# Altium PCB CodeBlockPCB.PcbDoc
Units mm, origin at the board's own origin, x right, y up, seen from the top; angles counter-clockwise.
Board outline 65 x 65 mm, 2 copper layers (Top Layer, Bottom Layer); 37 components, 43 nets, 215 pads, 31 vias.
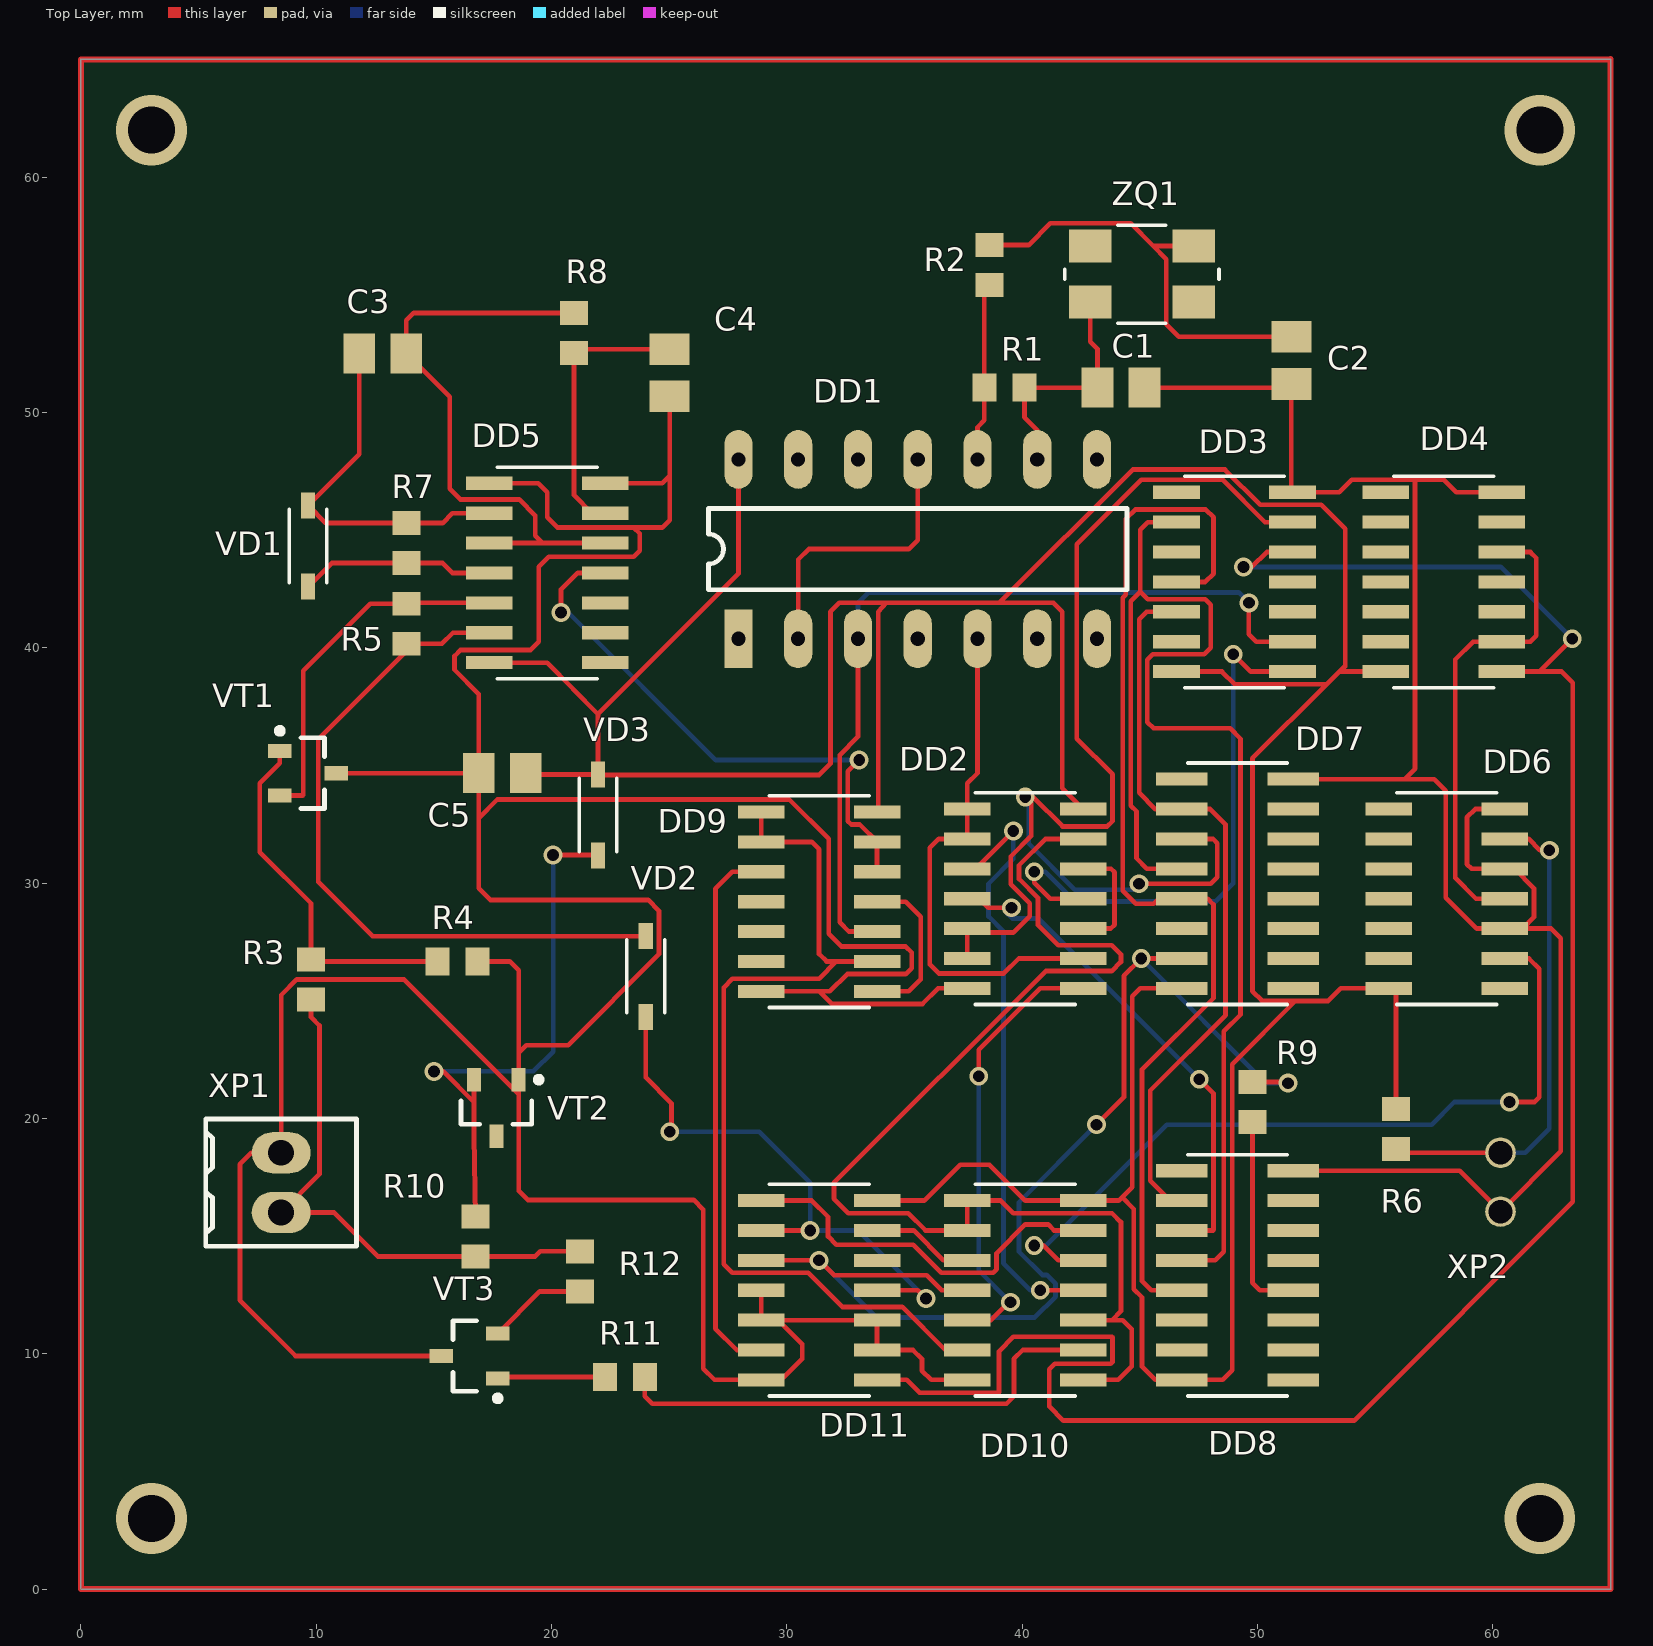
[diagram p0: Top Layer view]
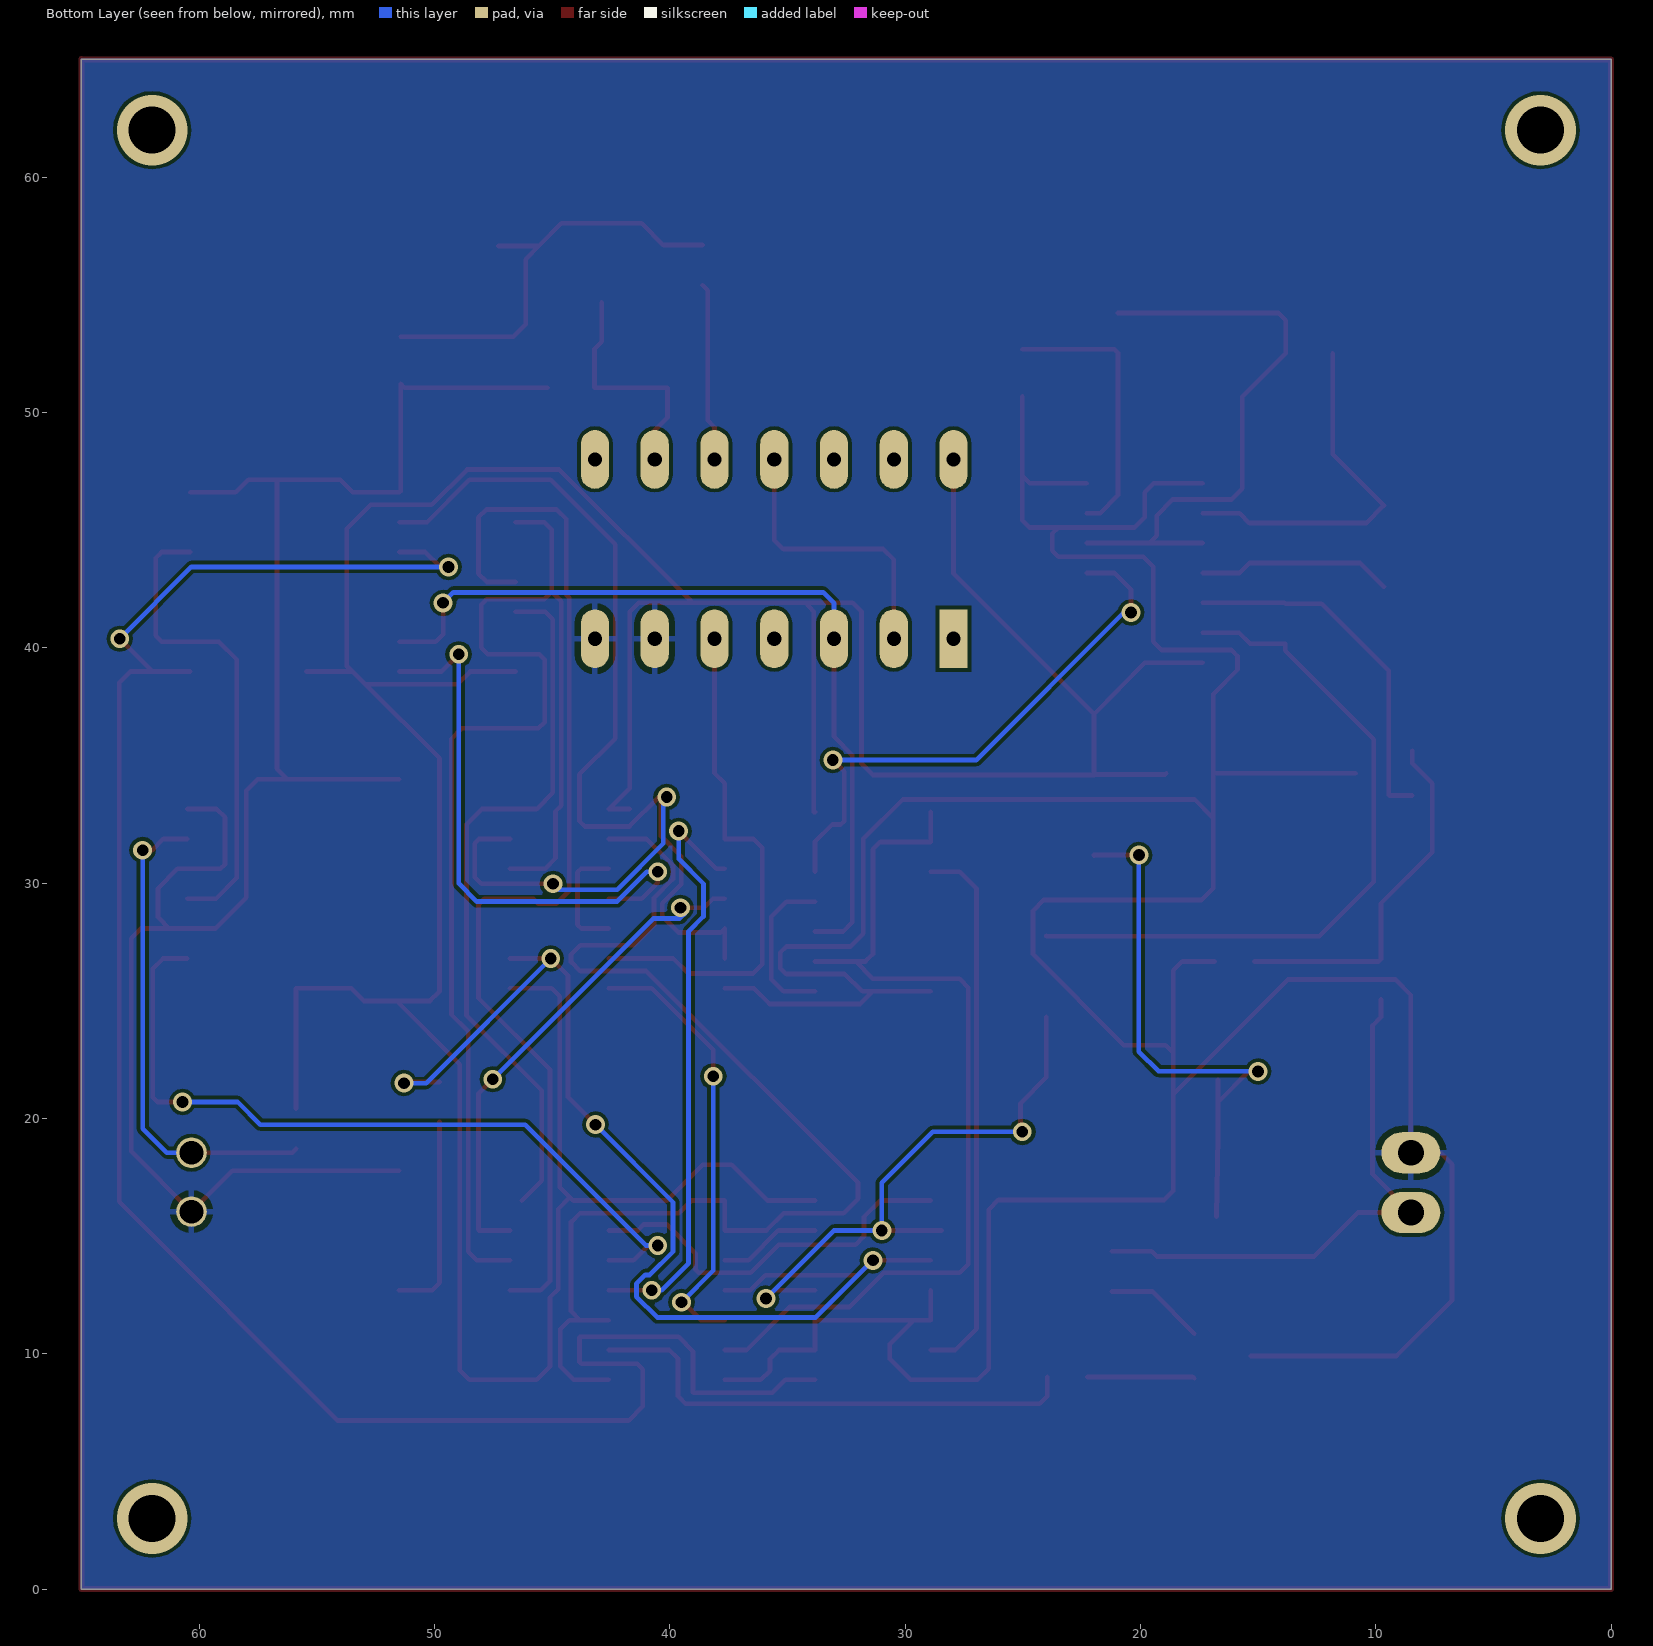
[diagram p1: Bottom Layer view, seen from below]
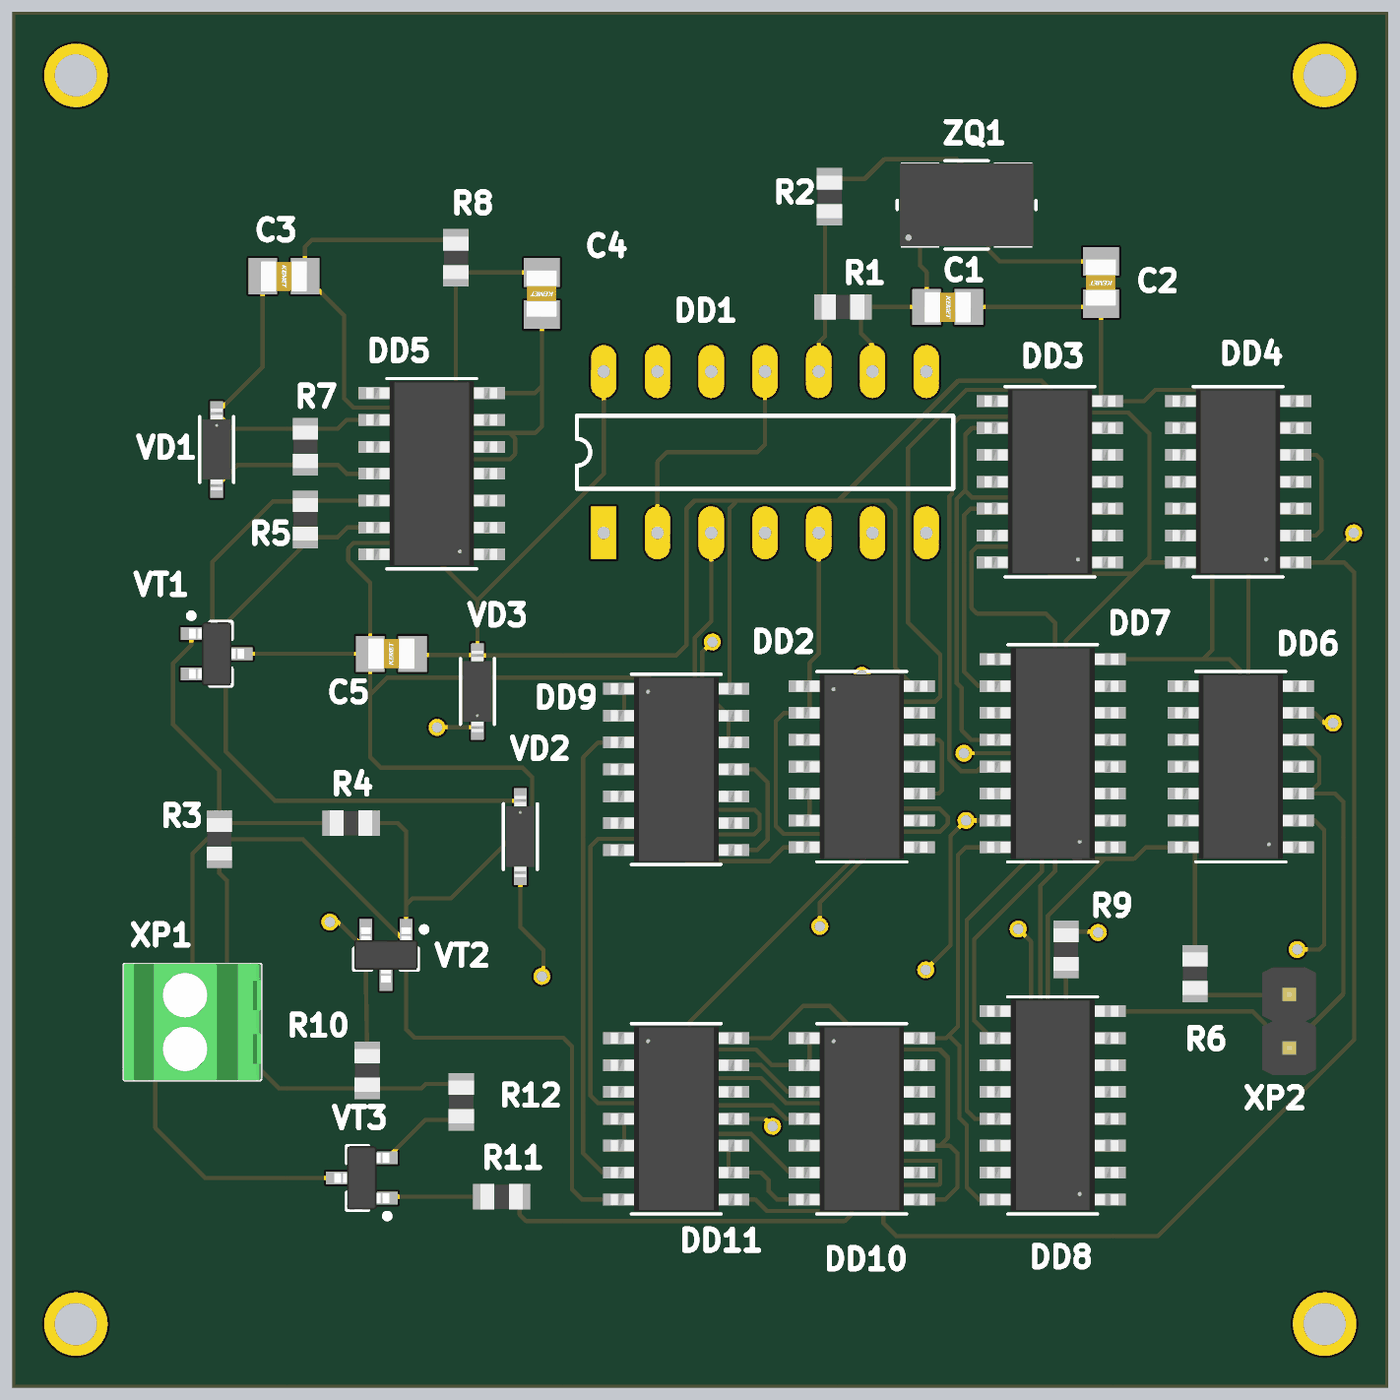
[diagram p2: 3D render of the assembled board from above, using the file's embedded part models]

## Layer stack, top to bottom
Top Solder: solder mask 0.0102, Solder Resist, Dk 3.5
Top Layer: signal copper 0.0356
Dielectric 1: core 0.32, FR-4, Dk 4.8
Bottom Layer: signal copper 0.0356
Solder Side: solder mask 0.0102, Solder Resist, Dk 3.5

## Board outline
0,0 0,65 65,65 65,0

## Design rules (kind name [scope] priority, off if disabled: settings)
Clearance [All] p1: gap=0.15 ignorepadtopadclearanceinfootprint=FALSE
HoleSize [All] p1: absolutevalues=TRUE maxlimit=3 minlimit=0.5 maxpercent=80.000 minpercent=20.000
PolygonConnect [All] p1: connectstyle=Relief reliefconductorwidth=0.254 reliefentries=4 polygonreliefangle="90 Angle" airgapwidth=0.254
RoutingVias [All] p1: holewidth=0.5 width=0.8 viastyle="Through Hole" minholewidth=0.4 minwidth=0.6 maxholewidth=0.4 maxwidth=0.6
SolderMaskExpansion [All] p1: expansion=0.102
Width Width_GND [InNetClass('GND')] p1: maxlimit=0.3 minlimit=0.3 preferedwidth=0.3
Width Width_VDD [InNetClass('VDD')] p2: maxlimit=0.3 minlimit=0.3 preferedwidth=0.3
Width [All] p3: maxlimit=0.25 minlimit=0.15 preferedwidth=0.2
29 further rules are at their usual default settings.

## Components (designator, comment, footprint, x,y, rotation, side; value= is the part's Value field where it differs from the comment)
C1 "С-0805 50 В 62 пФ 5% C0G/NP0 Kemet" C-0805 44.196,51.054 r180 top value="62 пФ"
C2 "С-0805 50 В 22 пФ 5% C0G/NP0 Kemet" C-0805 51.435,52.213 r90 top value="22 пФ"
C3 "С-0805 50 В 0.1 пФ 5% C0G/NP0 Kemet" C-0805 12.827,52.514 r180 top value="0.1 пФ"
C4 "С-0805 50 В 3300 пФ 5% C0G/NP0 Kemet" C-0805 25.019,51.689 r90 top value="3300 пФ"
C5 "С-0805 50 В 100 пФ 5% C0G/NP0 Kemet" C-0805 17.907,34.671 r0 top value="100 пФ"
DD1 "К176ИЕ5 СССР" DIP14 27.94,40.386 r90 top
DD2 "SN74F38DR Texas Instruments" D14 40.132,29.337 r0 top
DD3 "SN74F24DR Texas Instruments" D14 49.022,42.799 r180 top
DD4 "SN74F24DR Texas Instruments" D14 57.912,42.799 r180 top
DD5 "SN74F86DR Texas Instruments" D14 19.812,43.18 r180 top
DD6 "SN74F13DR Texas Instruments" D14 58.039,29.337 r180 top
DD7 "SN74F28DR Texas Instruments" D16 49.149,29.972 r180 top
DD8 "SN74F28DR Texas Instruments" D16 49.149,13.335 r180 top
DD9 "SN74F38DR Texas Instruments" D14 31.369,29.21 r0 top
DD10 "SN74F10DR Texas Instruments" D14 40.132,12.7 r0 top
DD11 "SN74F13DR Texas Instruments" D14 31.369,12.7 r0 top
R1 "R-0805 0,125 Вт 22 МОм 5% Hitano" RC0805N 39.243,51.054 r180 top value="22 МОм"
R2 "R-0805 0,125 Вт 560 кОм 5% Hitano" RC0805N 38.608,56.261 r270 top value="560 кОм"
R3 "R-0805 0,125 Вт 100 кОм 5% Hitano" RC0805N 9.779,25.908 r270 top value="100 кОм"
R4 "R-0805 0,125 Вт 10 кОм 5% Hitano" RC0805N 16.002,26.67 r180 top value="10 кОм"
R5 "R-0805 0,125 Вт 56 кОм 5% Hitano" RC0805N 13.843,41.021 r90 top value="56 кОм"
R6 "R-0805 0,125 Вт 1 кОм 5% Hitano" RC0805N 55.88,19.558 r90 top value="1 кОм"
R7 "R-0805 0,125 Вт 200 кОм 5% Hitano" RC0805N 13.843,44.45 r90 top value="200 кОм"
R8 "R-0805 0,125 Вт 10 кОм 5% Hitano" RC0805N 20.955,53.378 r270 top value="10 кОм"
R9 "R-0805 0,125 Вт 56 кОм 5% Hitano" RC0805N 49.784,20.701 r90 top value="56 кОм"
R10 "R-0805 0,125 Вт 10 кОм 5% Hitano" RC0805N 16.764,14.986 r270 top value="10 кОм"
R11 "R-0805 0,125 Вт 1.8 кОм 5% Hitano" RC0805N 23.114,9.017 r180 top value="1.8 кОм"
R12 "R-0805 0,125 Вт 100 Ом 5% Hitano" RC0805N 21.209,13.5 r90 top value="100 Ом"
VD1 "1N4148W-7-F NXP" SOD123 9.652,44.323 r270 top
VD2 "1N4148W-7-F NXP" SOD123 24.003,26.035 r270 top
VD3 "1N4148W-7-F NXP" SOD123 21.971,32.893 r90 top
VT1 "PBSS2540E ON Semiconductor" SOT23 9.652,34.671 r0 top
VT2 "PBSS2540E ON Semiconductor" SOT23 17.653,20.447 r270 top
VT3 "PBSS2540E ON Semiconductor" SOT23 16.51,9.906 r180 top
XP1 "732-2747-ND KLS" "TE 282834-2" 8.509,17.272 r90 top
XP2 "PLS-2 Ningbo Zhenqin Electronic" PLS-2 60.325,18.542 r270 top
ZQ1 "ABMM2-32.768MHZ Jauch" CRYSTAL_ABMM2 45.085,55.88 r90 top

## Footprints (in the part's own frame and the unit in brackets; to place one, negate y for a bottom-side part, rotate by r counter-clockwise, add the part's x,y. Pads: shape width x height; smd on the part's side, far side on the other; paste and mask are expansions set on the pad)
C-0805 [mm] "capacitor 0805"
  rect 1.35x1.7 smd: 1(-1,0) 2(1,0)
  body extent -1.1,-0.71 1.1,0.74, height 0.88
CRYSTAL_ABMM2 [mil]
  rect 55x71 smd paste+0 mask+0: 1(-47,86.5) 2(-47,-86.5) 3(47,-86.5) 4(47,86.5)
  silkscreen extent -82,-129 82,129, body extent -79,-124 79,124, height 48
D14 [mil]
  rect 78x22 smd paste+0 mask+0: 1(-97,150) 2(-97,100) 3(-97,50) 4(-97,0) 5(-97,-50) 6(-97,-100) 7(-97,-150) 8(97,-150) 9(97,-100) 10(97,-50) 11(97,0) 12(97,50) 13(97,100) 14(97,150)
  silkscreen extent -83,-177 84,177, body extent -122,-172 122,172, height 69
D16 [mil]
  rect 86x22 smd paste+0 mask+0: 1(-93,175) 2(-93,125) 3(-93,75) 4(-93,25) 5(-93,-25) 6(-93,-75) 7(-93,-125) 8(-93,-175) 9(93,-175) 10(93,-125) 11(93,-75) 12(93,-25) 13(93,25) 14(93,75) 15(93,125) 16(93,175)
  silkscreen extent -84,-202 83,202, body extent -122,-197 122,197, height 69
DIP14 [mm]
  rect 2.5x1.2 hole 0.6: 1(0,0)
  oval 2.5x1.2 hole 0.6: 2(0,-2.54) 3(0,-5.08) 4(0,-7.62) 5(0,-10.16) 6(0,-12.7) 7(0,-15.24) 8(7.62,-15.24) 9(7.62,-12.7) 10(7.62,-10.16) 11(7.62,-7.62) 12(7.62,-5.08) 13(7.62,-2.54) 14(7.62,0)
  silkscreen extent 2.08,-16.51 5.54,1.27, body extent 1.5,-16.5 6,1.5, height 7.36
PLS-2 [mm]
  round 1.3 hole 1: 1(0,0) 2(2.5,0)
  body extent -1.31,-1.27 3.77,1.27, height 8.47
RC0805N [mil]
  rect 40x47 smd paste+0 mask+0: 1(-33.5,0) 2(33.5,0)
  body extent -39,-23 39,24, height 28
SOD123 [mm]
  rect 1.111x0.601 smd: 1(-1.725,0) 2(1.725,0)
  silkscreen extent -1.55,-0.8 1.55,0.8, body extent -1.92,-0.67 1.92,0.67, height 0.81
SOT23 [mm] "SOT23, 3-Leads, Body 2,90x2,45mm, Pitch 0,95mm, IPC Medium Density"
  rect 1x0.6 smd: 1(-1.2,0.95) 2(-1.2,-0.95) 3(1.2,0)
  silkscreen extent -1.32,-1.5 0.7,1.92, body extent -1.3,-1.5 1.3,1.5, height 1.1
"TE 282834-2" [mm]
  oval 1.75x2.5 hole 1.1: 1(-1.27,0) 2(1.27,0)
  silkscreen extent -2.7,-3.2 2.7,3.2, body extent -2.77,-3.25 2.77,3.25, height 10

## Part data
C1 C2 C3 C4 C5: library part C-0805, "C-0805", Manufacturer=Kemet, Package=С-0805, Temp_Coef=C0G/NP0, Tolerance=5%, Voltage="50 В"
DD1: library part K176IE5(DD1), "CD4033BNSR", Manufacturer=СССР, ComponentLink1Description=Component, ComponentLink1URL=https://www.digikey.com/product-detail/en/texas-instruments/CD4033BNSR/CD4033BNSR-ND/1690980, Name=К176ИЕ5
DD2: library part K561LA7(DD2), "CD4011BM96", Manufacturer="Texas Instruments", ComponentLink1Description=CD4011BM96, ComponentLink1URL=https://www.digikey.com/product-detail/en/texas-instruments/CD4011BM96/296-14474-2-ND/555772, ComponentLink2Description=Component, ComponentLink2URL=https://www.digikey.com/product-detail/en/texas-instruments/SN74F38DR/296-14312-2-ND/528568, Name=SN74F38DR
DD3: library part K176IE1(DD3), "CD4024BM", Manufacturer="Texas Instruments", ComponentLink1Description=Component, ComponentLink1URL=https://www.digikey.com/product-detail/en/texas-instruments/CD4024BM/296-25942-5-ND/1690888, Name=SN74F24DR
DD4: library part K176IE1(DD11), "CD4024BM", Manufacturer="Texas Instruments", ComponentLink1Description=Component, ComponentLink1URL=https://www.digikey.com/product-detail/en/texas-instruments/CD4024BM/296-25942-5-ND/1690888, Name=SN74F24DR
DD5: library part K561LP2(DD9), "CD4070BM96", Manufacturer="Texas Instruments", ComponentLink1Description=Component, ComponentLink1URL=https://www.digikey.com/product-detail/en/texas-instruments/CD4070BM96/296-31517-2-ND/1691299, Name=SN74F86DR
DD6: library part K561TM2(DD8), "CD4013BM96", Manufacturer="Texas Instruments", ComponentLink1Description=Component, ComponentLink1URL=https://www.digikey.com/product-detail/en/texas-instruments/CD4013BM96/296-24347-2-ND/1690718, Name=SN74F13DR
DD7: library part K561ID1(DD4), "CD4028BM96", Manufacturer="Texas Instruments", ComponentLink1Description=Component, ComponentLink1URL=https://www.digikey.com/product-detail/en/texas-instruments/CD4028BM96/296-16702-2-ND/614903, Name=SN74F28DR
DD8: library part K561ID1(DD5), "CD4028BM96", Manufacturer="Texas Instruments", ComponentLink1Description=Component, ComponentLink1URL=https://www.digikey.com/product-detail/en/texas-instruments/CD4028BM96/296-16702-2-ND/614903, Name=SN74F28DR
DD9: library part K561LA7(DD10), "CD4011BM96", Manufacturer="Texas Instruments", ComponentLink1Description=Component, ComponentLink1URL=https://www.digikey.com/product-detail/en/texas-instruments/CD4011BM96/296-14474-2-ND/555772, Name=SN74F38DR
DD10: library part K561LA9(DD7), "CD4023BM", Manufacturer="Texas Instruments", ComponentLink1Description=Component, ComponentLink1URL=https://www.digikey.com/product-detail/en/texas-instruments/CD4023BM/296-25941-5-ND/1690876, Name=SN74F10DR
DD11: library part K561TM2(DD6), "CD4013BM96", Manufacturer="Texas Instruments", ComponentLink1Description=Component, ComponentLink1URL=https://www.digikey.com/product-detail/en/texas-instruments/CD4013BM96/296-24347-2-ND/1690718, Name=SN74F13DR
R1 R2 R3 R4 R5 R6 R7 R8 R9 R10 R11 R12: library part R-0805, "R-0805", Manufacturer=Hitano, Power="0,125 Вт", Tolerance=5%, ComponentLink1Description=Component, ComponentLink1URL=https://www.digikey.com/product-detail/en/yageo/RC0805JR-07100RL/311-100ARTR-ND/728238, Package=R-0805
VD1 VD2 VD3: library part 1N4148W-7-F, "1N4148W-7-F", Manufacturer=NXP, Name=1N4148W-7-F
VT1 VT2 VT3: library part KSC1623YMTF, "KSC1623YMTF", Manufacturer="ON Semiconductor", ComponentLink1Description=Component, ComponentLink1URL=https://www.digikey.com/product-detail/en/on-semiconductor/KSC1623YMTF/KSC1623YMTFTR-ND/1047566, Name=PBSS2540E
XP1: library part 732-2747-ND(Input), "732-2747-ND", Manufacturer=KLS, Name=732-2747-ND
XP2: library part PLS-2, "PLS-2", Manufacturer="Ningbo Zhenqin Electronic", Name=PLS-2
ZQ1: library part ABMM2-32.768kHZ, "ABMM2-32.768kHZ", Manufacturer=Jauch, Name=ABMM2-32.768MHZ

## Via types
v1: diameter 0.8, hole 0.5, Top Layer to Bottom Layer, 27 vias
v2: diameter 3, hole 2, Top Layer to Bottom Layer, 4 vias

## Nets (pads, with @x,y where several pads share a name; then routed paths per layer and width w, separated by ;. In a path a pad name is that pad's centre, name@x,y a point inside that pad or via, vN(x,y) a via of type N, cw(c..) or ccw(c..) an arc to the next point about the centre after c; other vN are vias at no path point)
GND: C1.1 C2.1 C4.1 C5.1 DD1.6 DD1.7 DD2.7 DD3.7 DD4.7 DD5.7 DD5.8 DD6.3 DD6.5 DD6.7 DD7.8 DD8.8 DD9.7 DD10.7 DD11.4 DD11.5 DD11.7 DD11.9 DD11.10 R4.1 VT1.3 VT2.1 VT3.3 XP1.2 XP2.2 | length 264.7
  Top Layer w0.2: VT1.3 C5.1 ; VT3.3 9.119,9.906 6.756,12.268 6.756,18.059 7.239,18.542 XP1.2 8.509,25.246 9.171,25.908 13.726,25.908 18.603,21.031 ; R4.1 18.222,26.67 18.603,26.289 18.603,22.796 ; DD5.8 19.431,46.99 19.812,46.609 19.812,45.555 20.256,45.11 23.495,45.11 ; DD5.7 24.701,46.99 25.019,47.307 ; C4.1 25.019,47.307 ; DD11.4 DD11.5 DD11.5@29.642,11.43 ; DD9.7 31.369,25.4 ; DD10.7 36.131,8.89 35.738,9.284 35.738,9.779 35.357,10.16 DD11.9 DD11.10 DD11.5@29.642,11.43 ; DD2.7 36.424,25.527 35.763,24.867 31.902,24.867 31.369,25.4 ; C1.1 51.276,51.054 C2.1 51.435,46.66 DD3.7 53.467,46.609 54,47.142 56.693,47.142 ; DD8.8 58.587,17.78 XP2.2 62.89,18.607 62.89,27.661 62.484,28.067 DD6.3@61.265,28.067 ; DD7.8 56.248,34.417 ; DD4.7 58.445,46.609 57.912,47.142 56.693,47.142 ; DD6.7 59.247,33.147 58.9,32.8 58.9,30.8 59.093,30.607 DD6.5 60.922,30.607 61.747,29.781 61.747,28.55 DD6.3@61.265,28.067 ; 16.907,32.766 16.907,29.778 17.399,29.286 24.105,29.286 24.562,28.829 24.562,26.975 20.701,23.114 18.921,23.114 18.603,22.796 ; 16.907,32.766 17.694,33.553 30.099,33.553 31.775,31.877 31.775,27.851 32.322,27.305 35.052,27.305 35.306,27.051 35.306,26.391 35.052,26.137 32.563,26.137 31.826,25.4 31.369,25.4 ; 16.907,32.766 C5.1 ; C5.1 16.907,38.033 15.875,39.065 15.875,39.649 16.129,39.903 19.101,39.903 19.456,40.259 19.456,43.434 19.888,43.866 23.495,43.866 23.749,44.12 23.749,44.856 23.495,45.11 ; 18.603,21.031 18.603,16.919 18.986,16.535 26.035,16.535 26.441,16.129 26.441,9.373 26.924,8.89 DD11.7 29.769,8.89 30.658,9.779 30.658,10.414 DD11.5@29.642,11.43 ; 18.603,21.031 VT2.1 18.603,22.796 ; 23.495,45.11 24.701,45.11 25.019,45.428 25.019,47.307 ; 56.248,34.417 57.5,34.417 58,33.917 58,29.376 59.309,28.067 DD6.3 DD6.3@61.265,28.067 ; 56.248,34.417 56.693,34.861 56.693,47.142
NetC1_2: C1.2 DD1.9 R1.1 ZQ1.1 | length 10.1
  Top Layer w0.2: DD1.9 40.64,49.251 40.094,49.797 R1.1 C1.2 43.196,52.705 42.888,53.013 ZQ1.1
NetC2_2: C2.2 R2.1 ZQ1.3 | length 18.5
  Top Layer w0.2: R2.1 40.272,57.112 41.199,58.039 44.602,58.039 45.568,57.074 ; ZQ1.3 46.152,57.074 45.568,57.074 ; C2.2 46.66,53.213 46.126,53.746 46.126,56.515 45.568,57.074
NetC3_1: C3.1 DD5.5 DD5.10 R8.1 | length 25.5
  Top Layer w0.2: DD5.10 19.621,44.45 ; R8.1 14.144,54.229 13.827,53.911 C3.1 15.672,50.669 15.672,46.761 16.129,46.304 18.618,46.304 19.304,45.618 19.304,44.767 19.621,44.45 ; DD5.5 19.621,44.45
NetC3_2: C3.2 DD5.9 R7.2 VD1.1 | length 15.5
  Top Layer w0.2: C3.2 11.827,48.225 9.652,46.05 VD1.1 10.399,45.301 R7.2 15.367,45.301 15.786,45.72 DD5.9
NetC4_2: C4.2 DD5.6 R8.2 | length 11.8
  Top Layer w0.2: DD5.6 21.717,45.72 20.955,46.482 R8.2 21.117,52.689 C4.2
NetDD1_2: DD1.2 DD1.11 | length 12.2
  Top Layer w0.2: DD1.2 30.48,43.752 30.924,44.196 35.179,44.196 35.56,44.577 DD1.11
NetDD1_3: DD1.3 DD3.2 DD9.10 | length 35.9
  Top Layer w0.2: DD1.3 33.02,36.22 32.242,35.443 32.242,28.337 32.639,27.94 DD9.10 ; v1(49.632,41.91) 49.632,40.576 49.949,40.259 DD3.2
  Bottom Layer w0.2: DD1.3 33.02,41.885 33.485,42.35 49.192,42.35 v1(49.632,41.91)
NetDD1_5: DD1.5 DD2.1 DD2.2 DD2.9 | length 23
  Top Layer w0.2: DD1.5@37.668,39.954 DD1.5 38.1,34.675 37.668,34.243 DD2.1 DD2.2 36.449,31.877 36.068,31.496 36.068,26.543 36.449,26.162 39.218,26.162 39.853,26.797 DD2.9
NetDD1_10: DD1.10 R1.2 R2.2 | length 7.6
  Top Layer w0.2: DD1.10 38.1,49.378 38.392,49.67 R1.2 38.392,55.194 R2.2
NetDD2_3: DD2.3 DD10.11 | length 25.6
  Top Layer w0.2: DD2.3 38.022,30.607 v1(39.624,32.209) ; v1(40.767,12.7) DD10.11
  Bottom Layer w0.2: v1(39.624,32.209) 39.624,31.028 38.568,29.972 38.568,28.585 39.203,27.95 39.203,13.845 40.348,12.7 v1(40.767,12.7)
NetDD2_4: DD2.4 DD8.11 | length 21.6
  Top Layer w0.2: DD2.4 38.164,29.337 38.551,28.95 v1(39.55,28.95) ; DD8.11 48.108,15.24 48.133,15.265 48.133,21.057 v1(47.523,21.666)
  Bottom Layer w0.2: v1@39.37,28.854 v1@39.35,28.874 ; v1(39.55,28.95) 39.426,28.95 v1@39.35,28.874 ; v1(47.523,21.666) 40.691,28.499 39.573,28.499 39.35,28.722 v1@39.35,28.874
NetDD2_5: DD2.5 DD2.6 DD3.6 DD7.11 | length 52
  Top Layer w0.2: DD2.6 DD2.5 37.835,27.9 39.625,27.9 40.325,28.6 40.325,29.149 39.513,29.961 39.513,31.131 40.386,32.004 40.386,33.401 v1(40.132,33.655) 40.464,33.655 41.713,32.406 43.608,32.406 43.84,32.639 43.84,34.62 42.316,36.144 42.316,44.399 45.06,47.142 48.514,47.142 50.317,45.339 DD3.6 ; v1(44.958,29.972) 48.006,29.972 48.291,30.257 48.291,31.694 48.108,31.877 DD7.11
  Bottom Layer w0.2: v1(40.132,33.655) 40.274,33.513 40.274,31.684 42.24,29.718 44.704,29.718 v1(44.958,29.972)
NetDD2_8: DD2.8 DD10.5 | length 19
  Top Layer w0.2: DD10.5 38.672,11.43 39.497,12.255 v1(39.497,12.192) ; v1(38.151,21.793) 38.151,22.911 40.767,25.527 DD2.8
  Bottom Layer w0.2: v1(38.151,21.793) 38.151,13.538 v1(39.497,12.192)
NetDD2_10: DD2.10 DD2.12 | length 5
  Top Layer w0.2: DD2.10 43.752,28.067 43.925,28.24 43.925,30.455 43.773,30.607 DD2.12
NetDD2_11: DD2.11 DD3.1 | length 24.7
  Top Layer w0.2: v1(40.513,30.48) 40.513,30.023 41.199,29.337 DD2.11 ; v1(48.971,39.726) 49.708,38.989 DD3.1
  Bottom Layer w0.2: v1(40.513,30.48) 40.983,30.48 41.237,30.226 42.242,29.22 48.186,29.22 48.197,29.21 48.971,29.985 v1(48.971,39.726)
NetDD2_13: DD2.13 DD10.1 DD10.2 DD10.8 DD10.10 | length 52
  Top Layer w0.2: DD10.8 44.082,8.89 44.653,9.461 44.653,11.049 44.272,11.43 43.815,11.43 ; DD10.10 43.815,11.43 ; DD2.13 40.991,31.877 39.863,30.749 39.863,30.178 40.675,29.366 40.675,28.21 41.529,27.356 43.811,27.356 44.196,26.971 44.196,26.649 43.811,26.264 40.996,26.264 32,17.268 32,16.59 32.614,15.977 35.154,15.977 35.89,15.24 DD10.2 DD10.1 39.091,16.51 39.624,15.977 43.815,15.977 44.196,15.596 44.196,11.811 43.815,11.43
NetDD3_5: DD3.5 DD4.1 DD11.8 | length 88.9
  Top Layer w0.2: DD11.8 35.09,8.89 35.636,8.344 38.989,8.344 39.014,8.369 39.014,10.109 39.624,10.719 43.815,10.719 43.84,10.693 43.84,9.652 43.764,9.576 41.377,9.576 41.148,9.347 41.148,7.76 41.745,7.163 54.102,7.163 63.4,16.461 63.4,38.517 62.928,38.989 61.976,38.989 ; v1(49.403,43.434) 49.759,43.434 50.394,44.069 DD3.5 ; DD4.1 61.976,38.989 ; v1(63.373,40.386) 61.976,38.989
  Bottom Layer w0.2: v1(49.403,43.434) 60.325,43.434 v1(63.373,40.386)
NetDD3_9: DD3.9 DD7.12 DD8.12 | length 56.9
  Top Layer w0.2: DD3.9 45.339,45.339 45.021,45.021 45.021,42.38 ; DD8.12 48.197,13.97 48.565,14.338 48.565,23.698 49.276,24.409 49.276,36.131 48.831,36.576 45.58,36.576 45.318,36.839 45.318,39.497 45.55,39.73 47.736,39.73 48.006,40 48.006,41.834 47.777,42.062 45.339,42.062 45.021,42.38 ; DD7.12 45.301,30.607 44.856,31.051 44.856,33.058 44.618,33.297 44.618,41.976 45.021,42.38
NetDD3_11: DD3.11 DD7.13 DD8.13 | length 47.4
  Top Layer w0.2: DD3.11 47.777,42.799 48.133,43.155 48.133,45.542 47.8,45.875 44.8,45.875 44.398,45.473 44.398,42.251 44.268,42.121 44.268,30.607 44.275,30.6 44.275,29.684 44.831,29.128 45.585,29.128 45.795,29.337 DD7.13 47.879,29.337 48.129,29.087 48.129,25.117 45.095,22.082 45.095,13.091 45.485,12.7 DD8.13
NetDD3_12: DD3.12 DD7.10 DD8.10 | length 31
  Top Layer w0.2: DD8.10@46.293,16.51 45.445,17.358 45.445,21.188 48.641,24.384 48.641,32.487 47.981,33.147 DD7.10 45.657,33.147 44.968,33.836 44.968,41.212 45.285,41.529 DD3.12
NetDD4_2: DD4.2 DD4.5 DD6.4 | length 20.5
  Top Layer w0.2: DD4.5 61.595,44.069 61.849,43.815 61.849,40.513 61.595,40.259 DD4.2 59.157,40.259 58.4,39.502 58.4,30.221 59.284,29.337 DD6.4
NetDD5_4: DD5.4 DD9.12 DD9.13 | length 24.1
  Top Layer w0.2: v1(20.4,41.5) 20.4,42.473 21.107,43.18 DD5.4 ; v1(33.071,35.23) 32.592,34.751 32.592,32.637 32.739,32.491 33.092,32.491 DD9.13 DD9.12
  Bottom Layer w0.2: v1(20.4,41.5) 20.705,41.5 26.975,35.23 v1(33.071,35.23)
NetDD5_11: DD5.11 R7.1 VD1.2 | length 8.3
  Top Layer w0.2: VD1.2 10.653,43.599 R7.1 15.367,43.599 15.786,43.18 DD5.11
NetDD5_12: DD5.12 R5.2 VT1.2 | length 15.4
  Top Layer w0.2: VT1.2 9.423,33.721 9.449,33.746 9.449,39.027 12.294,41.872 R5.2 13.881,41.91 DD5.12
NetDD5_13: DD5.13 R5.1 VD2.1 | length 30.3
  Top Layer w0.2: DD5.13 15.811,40.64 15.342,40.17 R5.1 13.843,39.878 10.084,36.119 10.084,30.048 12.395,27.737 24.003,27.737 VD2.1
NetDD6_2: DD6.2 DD10.12 | length 33.5
  Top Layer w0.2: v1(40.513,14.605) 40.894,14.605 41.529,13.97 DD10.12 ; DD6.2 61.531,26.797 61.976,26.352 61.976,20.904 61.773,20.701 v1(60.706,20.701)
  Bottom Layer w0.2: v1(40.513,14.605) 41.021,14.605 46.152,19.736 57.404,19.736 58.369,20.701 v1(60.706,20.701)
NetDD6_6: DD6.6 R6.1 XP2.1 | length 20.9
  Top Layer w0.2: R6.1 56.045,18.542 XP2.1 ; DD6.6 61.519,31.877 61.996,31.4 v1(62.4,31.4)
  Bottom Layer w0.2: XP2.1 61.371,18.542 62.4,19.571 v1(62.4,31.4)
NetDD7_15: DD7.15 DD10.4 DD11.3 R9.2 | length 49.7
  Top Layer w0.2: DD11.3 v1(31.369,13.97) 32.004,13.335 35.937,13.335 36.572,12.7 DD10.4 ; v1(43.155,19.736) 44.323,20.904 44.323,26.06 v1(45.06,26.797) DD7.15 ; R9.2 51.248,21.552 v1(51.3,21.5)
  Bottom Layer w0.2: v1(31.369,13.97) 33.797,11.542 40.528,11.542 41.417,12.431 41.417,12.969 41.036,13.35 40.849,13.35 39.863,14.336 39.863,16.444 v1(43.155,19.736) ; v1(45.06,26.797) 50.357,21.5 v1(51.3,21.5)
NetDD8_4: DD8.4 R9.1 | length 8.7
  Top Layer w0.2: R9.1 49.784,13.018 50.102,12.7 DD8.4
NetDD9_1: DD9.1 DD9.2 DD9.9 DD10.6 | length 39.8
  Top Layer w0.2: DD9.1 DD9.2 31.051,31.75 31.369,31.432 31.369,26.987 31.686,26.67 32.106,26.67 ; DD9.9 32.106,26.67 ; DD10.6 36.726,10.16 34.898,11.989 32.36,11.989 30.912,13.437 27.686,13.437 27.315,13.808 27.315,25.562 27.686,25.933 31.369,25.933 32.106,26.67
NetDD9_3: DD9.3 DD11.6 | length 23.2
  Top Layer w0.2: DD11.6 27.877,10.16 26.965,11.072 26.965,29.759 27.686,30.48 DD9.3
NetDD9_8: DD9.8 DD9.11 | length 6.8
  Top Layer w0.2: DD9.8 35.179,25.4 35.687,25.908 35.687,28.575 35.052,29.21 DD9.11
NetDD10_3: DD10.3 DD11.13 | length 4.4
  Top Layer w0.2: DD11.13 35.382,15.24 36.652,13.97 DD10.3
NetDD10_9: DD10.9 R11.1 | length 21.5
  Top Layer w0.2: R11.1 23.965,8.191 24.282,7.874 39.332,7.874 39.649,8.191 39.649,9.779 40.03,10.16 DD10.9
NetDD10_13: DD10.13 DD11.1 | length 16.8
  Top Layer w0.2: DD11.1 31.051,16.51 31.75,15.811 31.75,14.986 32.106,14.63 35.37,14.63 36.563,13.437 38.075,13.437 38.079,13.441 38.762,13.441 38.909,13.587 38.909,14.271 40.132,15.494 41.097,15.494 41.351,15.24 DD10.13
NetDD11_2: DD11.2 DD11.11 VD2.2 | length 25.2
  Top Layer w0.2: VD2.2 24.003,21.742 25.095,20.65 25.095,19.507 v1(25.019,19.431) ; DD11.2@28.448,15.24 DD11.2 v1(30.988,15.24) ; DD11.11 35.56,12.7 v1(35.916,12.344)
  Bottom Layer w0.2: v1(25.019,19.431) 28.829,19.431 28.956,19.304 30.988,17.272 v1(30.988,15.24) 33.02,15.24 v1(35.916,12.344)
NetR3_1: R3.1 R4.2 VT1.1 | length 15.5
  Top Layer w0.2: VT1.1 8.452,35.097 7.595,34.239 7.595,31.318 9.779,29.134 R3.1 9.868,26.67 R4.2
NetR3_2: R3.2 R10.2 R12.2 XP1.1 | length 23.4
  Top Layer w0.2: R3.2 9.779,24.305 10.135,23.949 10.135,17.628 XP1.1 10.757,16.002 12.624,14.135 R10.2 19.304,14.135 19.52,14.351 R12.2
NetR10_1: R10.1 VD3.1 VT2.2 | length 23.7
  Top Layer w0.2: v1(15,22) 15.402,22 16.703,20.699 ; VT2.2 16.703,20.699 ; R10.1 16.703,19.245 16.703,20.699 ; v1(20.066,31.191) 21.971,31.191 VD3.1
  Bottom Layer w0.2: v1(15,22) 19.231,22 20.066,22.835 v1(20.066,31.191)
NetR11_2: R11.2 VT3.1 | length 4.6
  Top Layer w0.2: VT3.1 17.771,9.017 R11.2
NetR12_1: R12.1 VT3.2 | length 4.2
  Top Layer w0.2: VT3.2 19.503,12.649 R12.1
VDD: C5.2 DD1.14 DD2.14 DD3.14 DD4.14 DD5.14 DD6.14 DD7.16 DD8.16 DD9.14 DD10.14 DD11.14 R6.2 VD3.2 | length 180.8
  Top Layer w0.2: DD5.14 19.812,39.37 21.971,37.186 ; C5.2 18.96,34.618 VD3.2 ; DD1.14 27.94,43.155 21.971,37.186 ; DD11.14 35.839,16.51 37.363,18.034 38.608,18.034 40.132,16.51 DD10.14 44.107,16.51 44.247,16.65 ; DD9.14 33.884,33.02 33.884,41.529 34.227,41.91 ; DD2.14@41.707,33.147 DD2.14 41.707,34.036 41.707,41.529 41.326,41.91 39.027,41.91 ; DD3.14 48.489,38.989 49.022,38.456 52.934,38.456 ; DD7.16 45.021,25.527 44.679,25.184 44.679,17.081 44.247,16.65 ; DD4.14 53.467,38.989 ; R6.2 55.88,25.527 DD6.14 53.543,25.527 53.01,24.994 51.613,24.994 ; VD3.2 21.971,37.186 ; VD3.2 21.971,34.595 31.369,34.595 31.852,35.077 31.852,41.529 32.233,41.91 34.227,41.91 ; 34.227,41.91 39.027,41.91 ; 39.027,41.91 44.691,47.574 48.616,47.574 50.114,46.076 52.705,46.076 53.721,45.06 53.721,39.205 53.683,39.205 53.467,38.989 ; 44.247,16.65 44.745,16.152 44.745,12.741 45.095,12.391 45.095,9.452 45.657,8.89 DD8.16 48.514,8.89 48.92,9.296 48.92,22.301 51.613,24.994 ; 51.613,24.994 50.19,24.994 49.784,25.4 49.784,35.306 52.934,38.456 ; 52.934,38.456 53.467,38.989
pads on no net: DD1.1 DD1.4 DD1.8 DD1.12 DD1.13 DD3.3 DD3.4 DD3.8 DD3.10 DD3.13 DD4.3 DD4.4 DD4.6 DD4.8 DD4.9 DD4.10 DD4.11 DD4.12 DD4.13 DD5.1 DD5.2 DD5.3 DD6.1 DD6.8 DD6.9 DD6.10 DD6.11 DD6.12 DD6.13 DD7.1 DD7.2 DD7.3 DD7.4 DD7.5 DD7.6 DD7.7 DD7.9 DD7.14 DD8.1 DD8.2 DD8.3 DD8.5 DD8.6 DD8.7 DD8.9 DD8.14 DD8.15 DD9.4 DD9.5 DD9.6 DD11.12 VT2.3 ZQ1.2 ZQ1.4
copper on no net: | length 260
  Top Layer w0.254: 65,65 0,65 0,0 65,0 65,65.024
  other v2: 3,3 62,3 3,62 62,62

## Polygon pours and split planes (outlines as drawn)
GND on Bottom Layer "Bottom Layer-GND" (solid, pour order 4): 0,65.024 0.127,65.024 65.024,65.024 65.024,0 0,0

## Silkscreen, mask and mechanical layers (free items; w line width, h text height)
Mechanical 13:
  circle w0.254: c3,62 r1.545
  circle w0.254: c3,3 r1.565
  circle w0.254: c62,3 r1.606
  circle w0.254: c62,62 r1.535
  lines w0.254: 0,65 65.025,65 65.025,0.05 0.025,0.05 0.025,64.875
Drill Drawing:
  circle w0.254: c7.411,103.626 r1.805
  lines w0.254: 5.606,77.461 9.215,77.461 9.215,81.07 5.606,81.07 5.606,77.461 ; 5.606,89.19 9.215,89.19 7.411,85.581 5.606,89.19 ; 5.606,94.604 6.508,94.604 7.411,93.702 8.313,94.604 9.215,94.604 8.313,95.506 9.215,96.408 8.313,96.408 7.411,97.311 6.508,96.408 5.606,96.408 6.508,95.506 5.606,94.604 ; 5.606,109.942 7.411,110.844 9.215,109.942 8.313,111.747 9.215,113.551 7.411,112.649 5.606,113.551 6.508,111.747 5.606,109.942
  lines w0.5: -7.225,115.626 103.95,115.626 ; 21.256,75.025 21.256,123.747 ; 42.821,75.025 42.821,123.747 ; 74.569,75.025 74.569,123.747 ; -7.225,75.025 103.95,75.025 103.95,123.747 -7.225,123.747 -7.225,75.025
  text "Позначення" at -2.353,118.062 h4.8
  text "Кількість" at 23.692,118.062 h4.8
  text "Розмір отвору" at 45.257,118.062 h4.8
  text "Металізація" at 77.005,118.062 h4.8
  text "27" at 30.137,109.942 h4
  text "0,50mm" at 53.551,109.942 h4
  text "PTH" at 84.902,109.942 h4
  text "14" at 30.824,101.822 h4
  text "0,60mm" at 53.551,101.822 h4
  text "PTH" at 84.902,101.822 h4
  text "4" at 31.277,93.702 h4
  text "2,00mm" at 53.481,93.702 h4
  text "PTH" at 84.902,93.702 h4
  text "2" at 31.099,85.581 h4
  text "1,00mm" at 53.989,85.581 h4
  text "PTH" at 84.902,85.581 h4
  text "2" at 31.099,77.461 h4
  text "1,10mm" at 54.238,77.461 h4
  text "PTH" at 84.902,77.461 h4